# Altium PCB PCB.PcbDoc
Units mm, origin at the board's own origin, x right, y up, seen from the top; angles counter-clockwise.
Board outline 105.28 x 72.77 mm, 2 copper layers (Top Layer, Bottom Layer); 30 components, 24 nets, 119 pads, 15 vias.
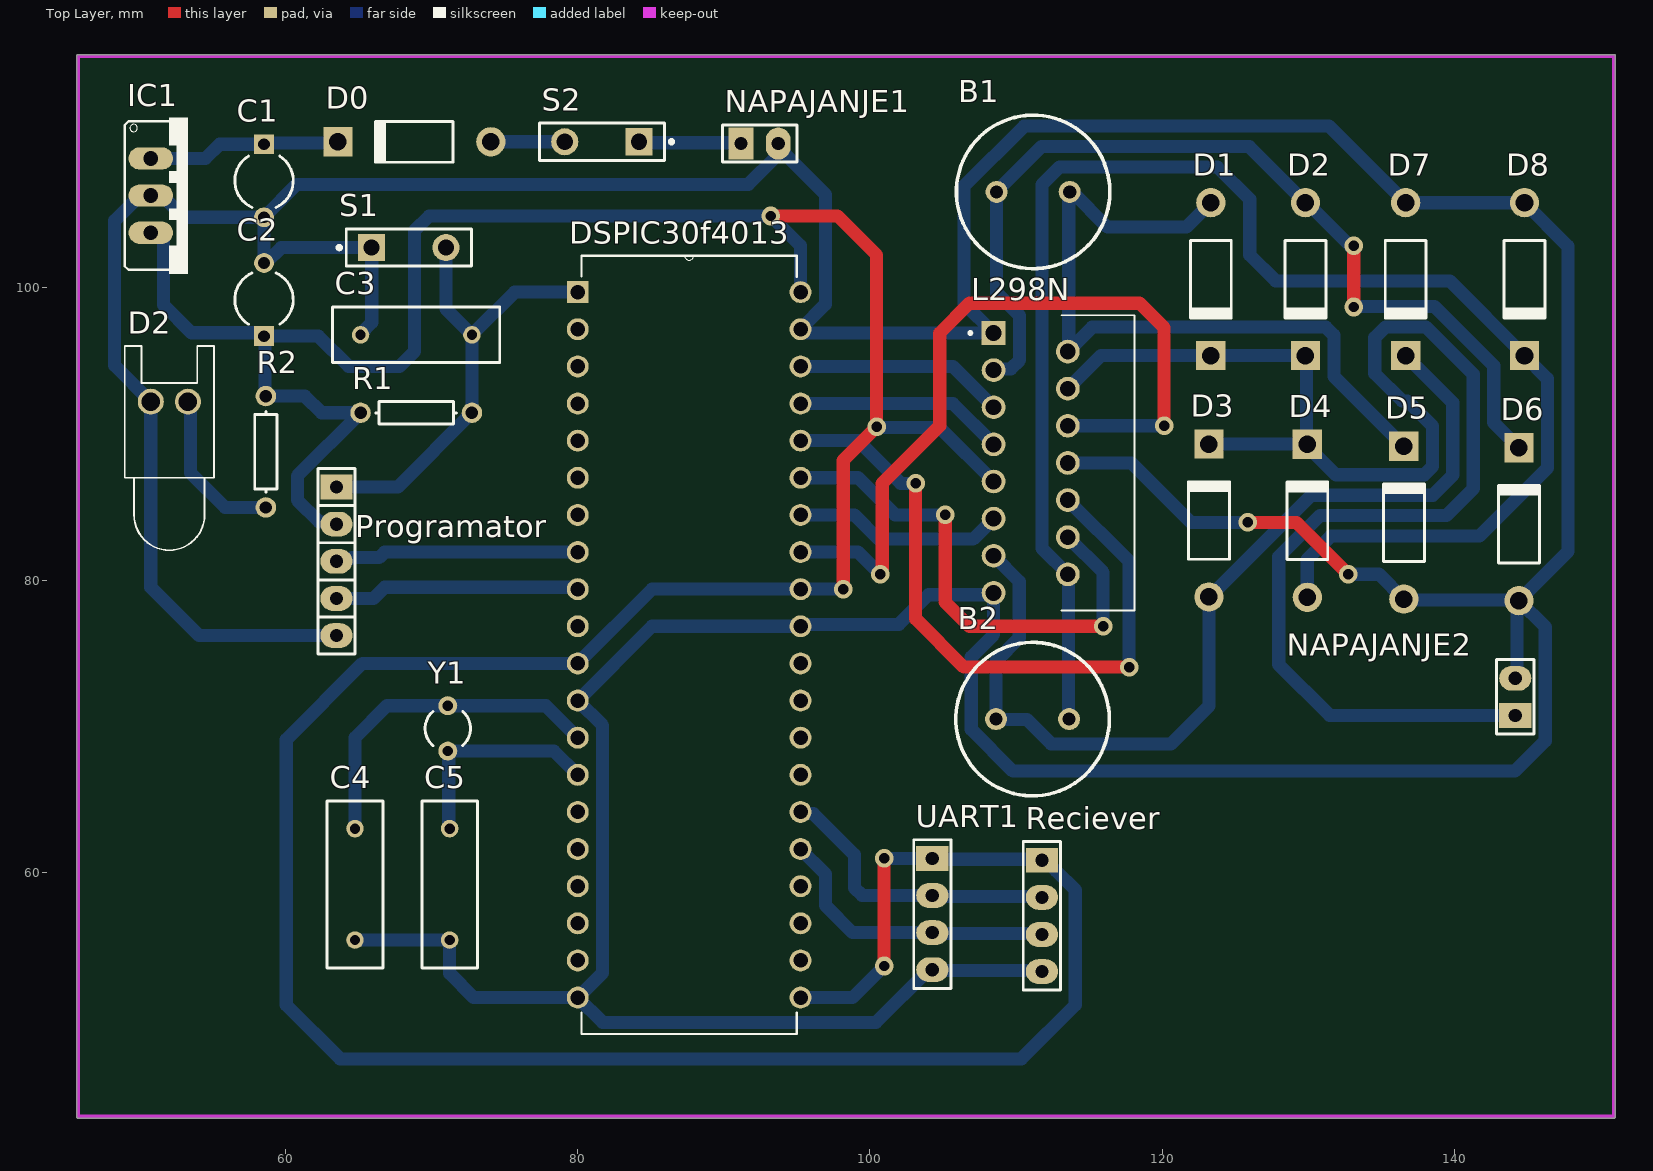
[diagram p0: Top Layer view]
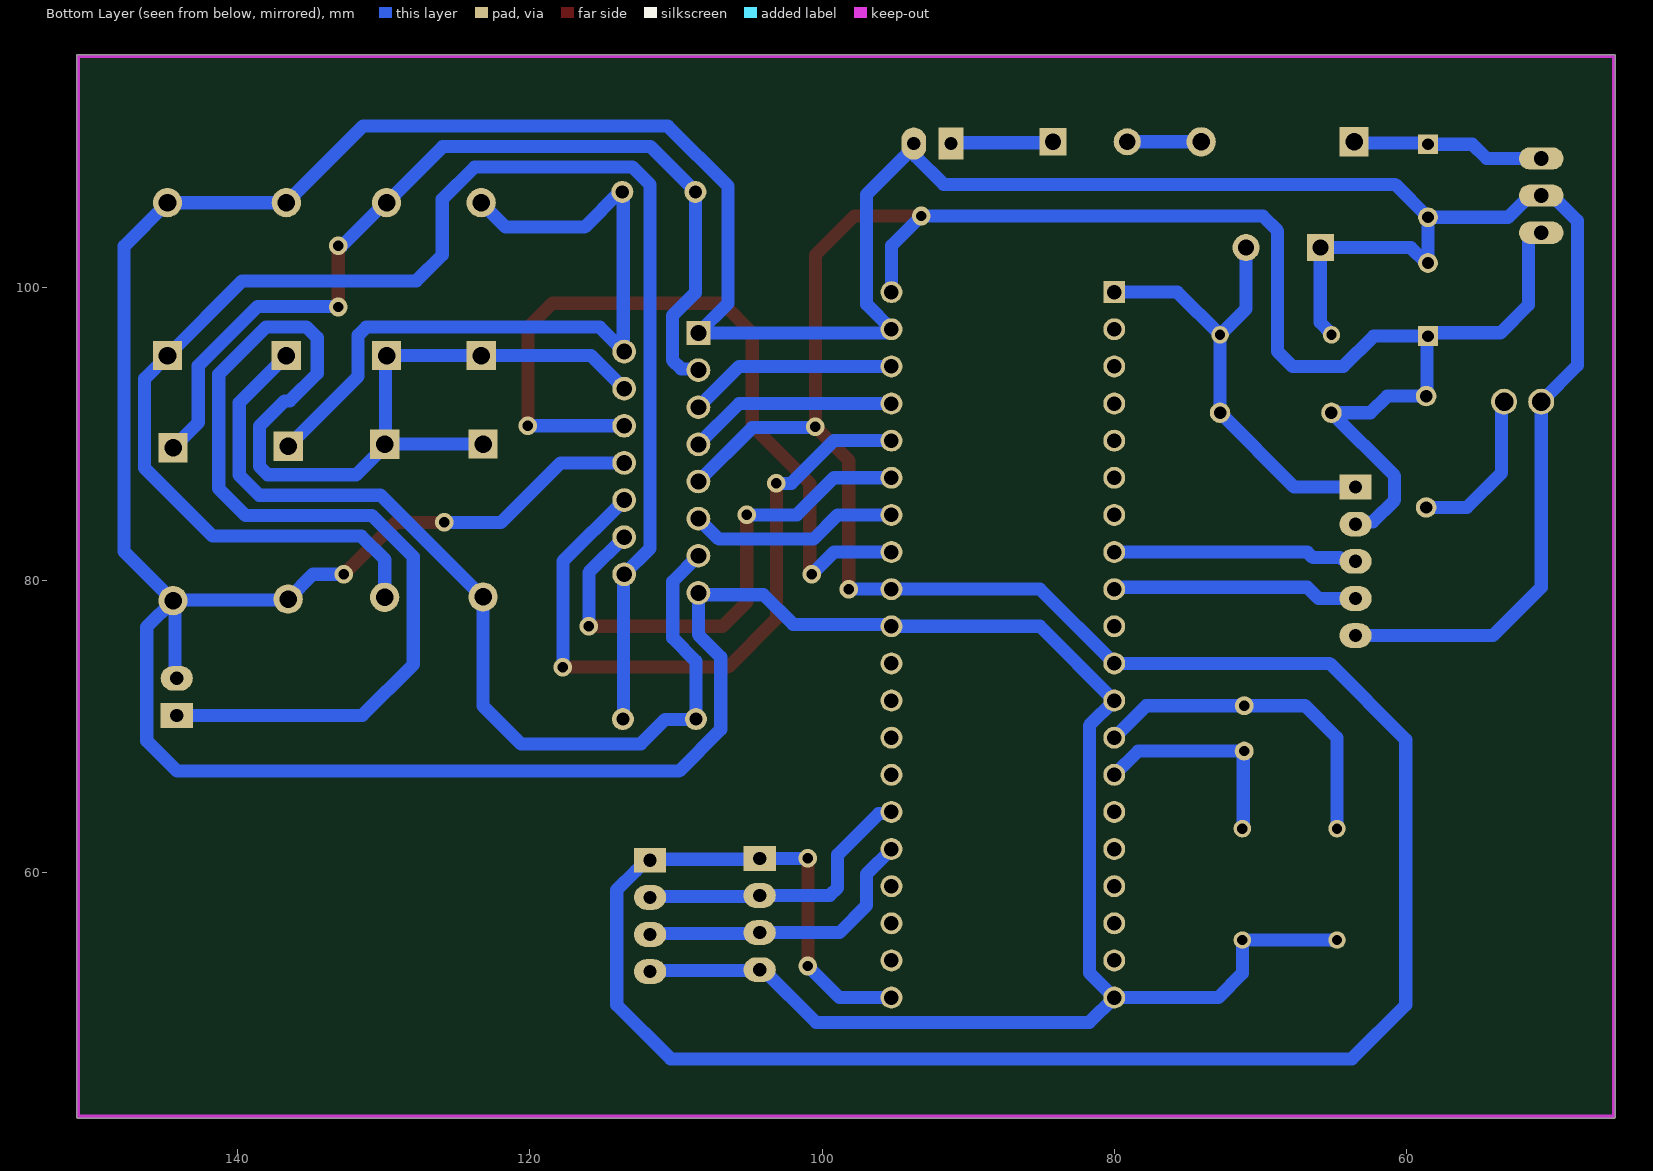
[diagram p1: Bottom Layer view, seen from below]

## Layer stack, top to bottom
Top Solder: solder mask 0.0102, Solder Resist, Dk 3.5
Top Layer: signal copper 0.0356
Dielectric 1: dielectric 0.32, FR-4, Dk 4.8
Bottom Layer: signal copper 0.0356
Bottom Solder: solder mask 0.0102, Solder Resist, Dk 3.5

## Board outline
45.72,43.307 45.72,115.824 cw(c45.847,115.824) 45.847,115.951 150.876,115.951 cw(c150.876,115.824) 151.003,115.824 151.003,43.307 cw(c150.876,43.307) 150.876,43.18 45.847,43.18 cw(c45.847,43.307)

## Design rules (kind name [scope] priority, off if disabled: settings)
Clearance [All] p1: gap=0.5 ignorepadtopadclearanceinfootprint=FALSE
PolygonConnect [All] p1: connectstyle=Relief reliefconductorwidth=0.254 reliefentries=4 polygonreliefangle="90 Angle" airgapwidth=0.254
RoutingVias [All] p1: holewidth=0.711 width=1.27 viastyle="Through Hole" minholewidth=0.711 minwidth=1.27 maxholewidth=0.711 maxwidth=1.27
SolderMaskExpansion [All] p1: expansion=0.102 istentingtop=FALSE
Width [All] p1: maxlimit=1 minlimit=0.8 preferedwidth=0.9 minimp=50.000000 maximp=50.000000 favimp=50.000000
30 further rules are at their usual default settings.

## Components (designator, comment, footprint, x,y, rotation, side; value= is the part's Value field where it differs from the comment)
B1 "Motor" RB5-10.5 111.165,106.553 r180 top
B2 "Motor" RB5-10.5 111.125,70.485 r0 top
C1 "Cap2" CAPR5-4X5 58.547,107.315 r270 top value=0.33uF
C2 "Cap2" CAPR5-4X5 58.547,99.187 r90 top value=0.1uF
C3 "Cap" RAD-0.3 68.961,96.774 r0 top value=100nF
C4 "Cap" RAD-0.3 64.77,59.182 r90 top value=22pF
C5 "Cap" RAD-0.3 71.247,59.182 r90 top value=22pF
D0 "Diode 1N4007" DO-41 68.834,109.982 r180 top
D1 "Diode 1N4001" DO-41 123.317,100.584 r270 top
D2 "Diode 1N4001" DO-41 129.794,100.584 r270 top
D2 "LED0" LED-0 52.07,92.202 r0 top
D3 "Diode 1N4001" DO-41 123.19,84.074 r90 top
D4 "Diode 1N4001" DO-41 129.921,84.051 r90 top
D5 "Diode 1N4001" DO-41 136.525,83.924 r90 top
D6 "Diode 1N4001" DO-41 144.399,83.82 r90 top
D7 "Diode 1N4001" DO-41 136.652,100.584 r270 top
D8 "Diode 1N4001" DO-41 144.78,100.584 r270 top
DSPIC30f4013 "DSPIC30f4013" DIP254P1524X635-40 95.25,51.435 r0 top
IC1 "L7805" 78XXS 53.34,106.299 r270 top
L298N "L298N" TO127P2020X500X2100-15 108.458,96.901 r0 top
NAPAJANJE1 "NAPAJANJE" HDR1X2 91.186,109.855 r0 top
NAPAJANJE2 "NAPAJANJE" HDR1X2 144.145,70.739 r90 top
Programator "Programator" HDR1X5 63.5,86.36 r270 top
R1 "Res1" AXIAL-0.3 68.961,91.44 r180 top value=10K
R2 "Res1" AXIAL-0.3 58.674,88.773 r90 top value=1K
Reciever "Reciever" HDR1X4 111.76,60.833 r270 top
S1 "SW-PB" SPST-2 68.453,102.743 r0 top
S2 "SW-SPST" SPST-2 81.661,109.982 r180 top
UART1 "UART1" HDR1X4 104.267,60.96 r270 top
Y1 "XTAL" R38 71.12,69.85 r0 top

## Footprints (in the part's own frame and the unit in brackets; to place one, negate y for a bottom-side part, rotate by r counter-clockwise, add the part's x,y. Pads: shape width x height; smd on the part's side, far side on the other; paste and mask are expansions set on the pad)
78XXS [mil]
  oval 60x120 hole 40: GND(0,-100) IN(-100,-100) OUT(100,-100)
  silkscreen extent -210,-170 210,0
AXIAL-0.3 [mm] "Axial Device, Thru-Hole; 2 Leads; 0.3 in Pin Spacing"
  round 1.4 hole 0.85: 1(-3.81,0) 2(3.81,0)
  silkscreen extent -2.77,-0.76 2.77,0.76
CAPR5-4X5 [mm] "Capacitor; 2 Leads"
  rect 1.35x1.35 hole 0.8: 1(-2.5,0)
  round 1.35 hole 0.8: 2(2.5,0)
  silkscreen extent -1.69,-2 1.82,2
DIP254P1524X635-40 [mil]
  rect 59x59 hole 39: 1(-600,1900)
  round 59 hole 39: 2(-600,1800) 3(-600,1700) 4(-600,1600) 5(-600,1500) 6(-600,1400) 7(-600,1300) 8(-600,1200) 9(-600,1100) 10(-600,1000) 11(-600,900) 12(-600,800) 13(-600,700) 14(-600,600) 15(-600,500) 16(-600,400) 17(-600,300) 18(-600,200) 19(-600,100) 20(-600,0) 21(0,0) 22(0,100) 23(0,200) 24(0,300) 25(0,400) 26(0,500) 27(0,600) 28(0,700) 29(0,800) 30(0,900) 31(0,1000) 32(0,1100) 33(0,1200) 34(0,1300) 35(0,1400) 36(0,1500) 37(0,1600) 38(0,1700) 39(0,1800) 40(0,1900)
  silkscreen extent -590,-98 -10,1998
DO-41 [mm] "Diode, Axial; Body 5.2 x 2.7 mm (LxDia. max), Lead Dia. 0.86 mm (max)"
  round 2 hole 1.2: 1(-5.23,0)
  rect 2x2 hole 1.2: 2(5.23,0)
  silkscreen extent -2.65,-1.4 2.75,1.4
HDR1X2 [mm]
  rect 1.7x2.2 hole 0.9: 1(0,0)
  oval 1.7x2.2 hole 0.9: 2(2.54,0)
  silkscreen extent -1.27,-1.27 3.81,1.27
HDR1X4 [mm]
  rect 1.7x2.2 hole 0.9: 1(0,0)
  oval 1.7x2.2 hole 0.9: 2(2.54,0) 3(5.08,0) 4(7.62,0)
  silkscreen extent -1.27,-1.27 8.89,1.27
HDR1X5 [mm]
  rect 1.7x2.2 hole 0.9: 1(0,0)
  oval 1.7x2.2 hole 0.9: 2(2.54,0) 3(5.08,0) 4(7.62,0) 5(10.16,0)
  silkscreen extent -1.27,-1.27 11.43,1.27
LED-0 [mil] "LED; 2 Leads"
  round 70 hole 50: 1(50,0) 2(-50,0)
  silkscreen extent -120,-400 120,150
R38 [mm] "Crystal, Thru-Hole; 2 Leads; Body 3.1 x 8.2 mm (Dia.xH)"
  round 1.3 hole 0.7: 1(0,1.55) 2(0,-1.55)
  silkscreen extent -1.55,-1.19 1.55,1.17
RAD-0.3 [mm] "Radial Cap, Thru-Hole; 2 Leads; 0.3 in Pin Spacing"
  round 1.2 hole 0.7: 1(-3.81,0) 2(3.81,0)
  silkscreen extent -5.71,-1.91 5.71,1.91
RB5-10.5 [mm] "Capacitor (Radial); 2 Leads"
  round 1.5 hole 0.9: 1(-2.5,0) 2(2.5,0)
  silkscreen extent -5.25,-5.25 5.25,5.25
SPST-2 [mm] "Switch; 2 Leads"
  rect 1.85x1.85 hole 1.1: 1(-2.54,0)
  round 1.85 hole 1.1: 2(2.54,0)
  silkscreen extent -4.89,-1.27 4.28,1.27
TO127P2020X500X2100-15 [mm]
  rect 1.62x1.62 hole 1.08: 1(0,0)
  round 1.62 hole 1.08: 2(5.08,-1.27) 3(0,-2.54) 4(5.08,-3.81) 5(0,-5.08) 6(5.08,-6.35) 7(0,-7.62) 8(5.08,-8.89) 9(0,-10.16) 10(5.08,-11.43) 11(0,-12.7) 12(5.08,-13.97) 13(0,-15.24) 14(5.08,-16.51) 15(0,-17.78)
  silkscreen extent -1.69,-18.99 9.63,1.21

## Part data
B1 B2: "Motor, General Kind", LatestRevisionDate=17-Jul-2002, LatestRevisionNote="Re-released for DXP Platform.", PackageDescription="Capacitor (Radial); 2 Leads", PackageReference=RB5-10.5, Published=24-Mar-1999, Publisher="Altium Limited"
C1 C2 C3 C4 C5: "Capacitor", Publisher="Altium Limited"
  C1 C2: PackageDescription="Capacitor; 2 Leads", PackageReference=CAPR5-4X5, Published=23-Sep-2002
  C3 C4 C5: LatestRevisionDate=17-Jul-2002, LatestRevisionNote="Re-released for DXP Platform.", PackageDescription="Radial Cap, Thru-Hole; 2 Leads; 0.3 in Pin Spacing", PackageReference=RAD-0.3, Published=8-Jun-2000
D0 D1 D2 D3 D4 D5 D6 D7 D8: "1 Amp General Purpose Rectifier", Code_JEDEC=DO-204-AL, ComponentLink1Description="Manufacturer Link", ComponentLink1URL=http://www.fairchildsemi.com/, ComponentLink2Description=Datasheet, ComponentLink2URL=http://www.fairchildsemi.com/ds/1N%2F1N4001.pdf, DatasheetVersion=1998, LatestRevisionDate=17-Jul-2002, LatestRevisionNote="Re-released for DXP Platform.", PackageDescription="Diode, Axial; Body 5.2 x 2.7 mm (LxDia. max), Lead Dia. 0.86 mm (max)", PackageReference=DO-41, PackageVersion=Aug-1999, Published=8-Jun-2000, Publisher="Altium Limited"
D2: "Typical INFRARED GaAs LED", LatestRevisionDate=08-Jul-2005, LatestRevisionNote="Mech Layer 1 removed.", PackageDescription="LED; 2 Leads", PackageReference=LED-0, Published=8-Jun-2000, Publisher="Altium Limited"
IC1: "Linear Voltage Regulator IC 1 Output 1.5A D2PAK", Package="TO-263-3 Inchange Semiconductor", Availability=Unavailable, MF=STMicroelectronics, MP=L7805, Price=None, SnapEDA_Link=https://www.snapeda.com/parts/L7805/STMicroelectronics/view-part/563125/?ref=snap
L298N: "Half Bridge _4_ Driver DC Motors, Relays, Solenoids, Stepper Motors Bipolar 15-Multiwatt", Package="Multiwatt-15 STMicroelectronics", Availability=Unavailable, MF=STMicroelectronics, MP=L298N, Price=None, SnapEDA_Link=https://www.snapeda.com/parts/L298N/STMicroelectronics/view-part/294022/?ref=snap
R1 R2: "Resistor", LatestRevisionDate=17-Jul-2002, LatestRevisionNote="Re-released for DXP Platform.", PackageDescription="Axial Device, Thru-Hole; 2 Leads; 0.3 in Pin Spacing", PackageReference=AXIAL-0.3, Published=8-Jun-2000, Publisher="Altium Limited"
S1: "Switch", LatestRevisionDate=17-Jul-2002, LatestRevisionNote="Re-released for DXP Platform.", PackageDescription="Switch; 2 Leads", PackageReference=SPST-2, Published=24-Mar-1999, Publisher="Altium Limited"
S2: "Single-Pole, Single-Throw Switch", LatestRevisionDate=17-Jul-2002, LatestRevisionNote="Re-released for DXP Platform.", PackageDescription="Switch; 2 Leads", PackageReference=SPST-2, Published=24-Mar-1999, Publisher="Altium Limited"
Y1: "Crystal Oscillator", LatestRevisionDate=17-Jul-2002, LatestRevisionNote="Re-released for DXP Platform.", PackageDescription="Crystal, Thru-Hole; 2 Leads; Body 3.1 x 8.2 mm (Dia.xH)", PackageReference=R38, Published=8-Jun-2000, Publisher="Altium Limited"

## Via types
v1: diameter 1.27, hole 0.711, Top Layer to Bottom Layer, 15 vias

## Nets (pads, with @x,y where several pads share a name; then routed paths per layer and width w, separated by ;. In a path a pad name is that pad's centre, name@x,y a point inside that pad or via, vN(x,y) a via of type N, cw(c..) or ccw(c..) an arc to the next point about the centre after c; other vN are vias at no path point)
5V: C2.1 DSPIC30f4013.11 DSPIC30f4013.21 DSPIC30f4013.32 DSPIC30f4013.40 IC1.OUT L298N.9 Programator.2 R1.2 R2.2 Reciever.1 UART1.1 | length 281.4
  Top Layer w0.9: v1(93.218,104.902) 97.79,104.902 100.457,102.235 100.457,90.507 v1(100.474,90.49) 98.171,88.187 v1(98.171,79.375) ; v1(100.965,53.594) v1(100.965,60.96)
  Bottom Layer w0.9: IC1.OUT 51.393,103.759 51.681,103.471 51.681,98.814 53.583,96.912 58.322,96.912 C2.1 ; Programator.2 63.347,83.973 62.331,83.973 60.833,85.471 60.833,87.122 R1.2 62.484,91.44 61.341,92.583 R2.2 58.61,92.647 58.61,96.623 C2.1 ; DSPIC30f4013.21 98.806,51.435 v1(100.965,53.594) ; DSPIC30f4013.40 95.25,102.87 v1(93.218,104.902) 69.85,104.902 68.834,103.886 68.834,95.631 67.818,94.615 64.331,94.615 62.259,96.687 C2.1 ; v1(98.171,79.375) DSPIC30f4013.32 85.09,79.375 DSPIC30f4013.11 65.278,74.295 60.071,69.088 60.071,50.927 63.754,47.244 110.363,47.244 114.046,50.927 114.046,58.803 112.756,60.093 112.75,60.093 112.01,60.833 Reciever.1 111.697,60.896 104.331,60.896 UART1.1 v1(100.965,60.96) ; v1(100.474,90.49) 100.54,90.424 104.775,90.424 L298N.9
9V: NAPAJANJE1.1 S2.1 | length 7
  Bottom Layer w0.9: S2.1 84.264,109.918 91.123,109.918 NAPAJANJE1.1
12V: D1.2 D2.2@129.794,95.354 D3.2 D4.2 L298N.4 NAPAJANJE2.1 | length 106.9
  Bottom Layer w0.9: L298N.4 115.801,95.354 D1.2 129.794,95.354 129.857,95.291 129.857,89.344 129.91,89.292 D4.2@129.791,89.292 ; D3.2 129.779,89.304 D4.2@129.791,89.292 ; NAPAJANJE2.1 131.445,70.739 127.971,74.213 127.971,81.593 130.782,84.404 139.427,84.404 141.275,86.252 141.275,90.194 141.275,94.075 138.046,97.304 135.258,97.304 134.535,96.58 134.535,94.128 136.408,92.254 136.769,92.254 138.475,90.548 138.475,87.76 137.919,87.204 131.879,87.204 D4.2@129.791,89.292
ENA: DSPIC30f4013.33 L298N.6 | length 54.5
  Top Layer w0.9: v1(100.711,80.391) 100.782,80.462 100.782,80.723 100.838,80.78 100.838,86.614 104.775,90.551 104.775,96.901 106.807,98.933 118.451,98.933 120.121,97.263 120.121,90.572 v1(120.142,90.551)
  Bottom Layer w0.9: DSPIC30f4013.33 99.187,81.915 v1(100.711,80.391) ; L298N.6 v1(120.142,90.551)
ENB: DSPIC30f4013.34 L298N.11 | length 14.5
  Bottom Layer w0.9: DSPIC30f4013.34 98.933,84.455 100.584,82.804 107.061,82.804 L298N.11
GND: C1.2 C2.2 C3.1 C4.1 C5.1 D2.2@50.8,92.202 D5.1 D6.1 D7.1 D8.1 DSPIC30f4013.12 DSPIC30f4013.20 DSPIC30f4013.31 DSPIC30f4013.39 IC1.GND L298N.1 L298N.8 L298N.15 NAPAJANJE1.2 NAPAJANJE2.2 Programator.5 Reciever.4 S1.1 UART1.4 | length 424.9
  Top Layer w0.9: v1(125.857,83.947) 129.159,83.947 v1(132.715,80.391)
  Bottom Layer w0.9: Programator.5 54.102,76.2 50.8,79.502 50.8,92.202 48.326,94.676 48.326,104.587 50.038,106.299 IC1.GND 51.581,106.299 53.065,104.815 C1.2 ; C4.1 C5.1 71.247,53.086 72.898,51.435 DSPIC30f4013.20 ; C3.1 65.151,96.855 65.913,97.617 S1.1 59.725,102.743 58.669,101.687 C2.2 C1.2 ; Reciever.4 111.697,53.276 104.331,53.276 UART1.4 104.017,53.34 100.413,49.736 81.709,49.736 DSPIC30f4013.20 ; L298N.8 117.89,88.011 121.954,83.947 v1(125.857,83.947) ; v1(132.715,80.391) 134.828,80.391 D5.1 136.577,78.642 144.347,78.642 D6.1 ; NAPAJANJE2.2 144.272,73.406 144.272,78.463 D6.1 ; C1.2 60.793,107.061 91.686,107.061 93.573,108.948 93.573,109.702 NAPAJANJE1.2 93.726,109.605 96.949,106.382 96.949,98.854 DSPIC30f4013.39 95.412,97.155 95.666,96.901 L298N.1 106.426,98.933 106.426,106.934 110.545,111.053 131.413,111.053 D7.1 D8.1 147.749,102.845 147.749,81.94 D6.1 ; DSPIC30f4013.20 81.709,53.134 81.709,70.056 DSPIC30f4013.12 85.09,76.835 DSPIC30f4013.31 95.365,76.95 95.788,76.95 95.8,76.962 101.981,76.962 104.007,78.988 108.325,78.988 L298N.15 108.458,76.265 106.925,74.732 106.925,69.781 109.777,66.929 144.126,66.929 146.195,68.998 146.195,76.794 D6.1
IN1: DSPIC30f4013.38 L298N.5 | length 14.4
  Bottom Layer w0.9: DSPIC30f4013.38 105.664,94.615 L298N.5
IN2: DSPIC30f4013.37 L298N.7 | length 14.4
  Bottom Layer w0.9: DSPIC30f4013.37 105.664,92.075 L298N.7
IN3: DSPIC30f4013.36 L298N.10 | length 47.5
  Top Layer w0.9: v1(103.124,86.614) 103.124,77.343 106.426,74.041 v1(117.729,74.041)
  Bottom Layer w0.9: DSPIC30f4013.36 99.187,89.535 102.108,86.614 v1(103.124,86.614) ; L298N.10 117.729,81.28 v1(117.729,74.041)
IN4: DSPIC30f4013.35 L298N.12 | length 35.5
  Top Layer w0.9: v1(105.156,84.455) 105.156,78.486 106.807,76.835 v1(115.951,76.835)
  Bottom Layer w0.9: DSPIC30f4013.35 99.187,86.995 101.727,84.455 v1(105.156,84.455) ; L298N.12 115.951,80.518 v1(115.951,76.835)
MCLR: C3.2 DSPIC30f4013.1 Programator.1 R1.1 S1.2 | length 31.9
  Bottom Layer w0.9: Programator.1 67.691,86.36 R1.1 C3.2 ; S1.2 70.993,98.552 C3.2 ; DSPIC30f4013.1 75.692,99.695 C3.2
NetC1_1: C1.1 D0.2 IC1.IN | length 13.3
  Bottom Layer w0.9: IC1.IN 54.538,108.839 55.514,109.815 C1.1 58.631,109.899 63.521,109.899 D0.2
NetD0_1: D0.1 S2.2 | length 5.1
  Bottom Layer w0.9: D0.1 S2.2
NetD2_1: D2.1@53.34,92.202 R2.1 | length 11.1
  Bottom Layer w0.9: D2.1@53.34,92.202 53.508,92.034 53.508,87.335 55.88,84.963 R2.1
OSC1: C4.2 DSPIC30f4013.13 Y1.1 | length 23.3
  Bottom Layer w0.9: C4.2 64.77,69.215 66.955,71.4 Y1.1 77.825,71.4 DSPIC30f4013.13
OSC2: C5.2 DSPIC30f4013.14 Y1.2 | length 14.9
  Bottom Layer w0.9: C5.2 71.19,63.049 71.19,68.23 Y1.2 78.385,68.3 DSPIC30f4013.14
OUT1: B1.1 D1.1 D5.2 L298N.2 | length 50.9
  Bottom Layer w0.9: L298N.2 L298N.2@113.602,95.694 ; D1.1 121.643,104.14 116.24,104.14 113.827,106.553 B1.1 113.602,106.489 L298N.2@113.602,95.694 ; D5.2 131.744,93.935 131.744,96.748 131.188,97.304 115.211,97.304 L298N.2@113.602,95.694
OUT2: B1.2 D2.1@129.794,105.814 D6.2 L298N.3 | length 64.5
  Top Layer w0.9: v1(133.096,98.679) v1(133.096,102.87)
  Bottom Layer w0.9: L298N.3 108.537,94.44 109.634,94.44 110.236,95.043 110.236,98.087 108.665,99.658 108.665,101.821 108.665,106.593 111.725,109.653 125.955,109.653 129.794,105.814 129.898,105.814 132.842,102.87 v1(133.096,102.87) ; v1(133.096,98.679) 133.121,98.704 138.625,98.704 142.675,94.654 142.675,90.774 D6.2
OUT3: B2.1 D3.1 D7.2 L298N.13 | length 66
  Bottom Layer w0.9: L298N.13 110.218,79.901 110.218,76.045 108.625,74.452 B2.1 108.642,70.468 110.725,70.468 112.408,68.785 120.601,68.785 123.19,71.374 D3.1 123.242,78.844 130.202,85.804 138.498,85.804 139.875,87.181 139.875,92.131 D7.2
OUT4: B2.2 D4.1 D8.2 L298N.14 | length 108.4
  Bottom Layer w0.9: B2.2 113.582,70.529 113.582,80.347 111.778,82.151 111.778,107.07 112.961,108.253 123.776,108.253 125.984,106.045 125.984,102.235 127.759,100.46 139.674,100.46 D8.2 146.349,93.785 146.349,87.656 141.697,83.004 131.518,83.004 129.921,81.407 D4.1
PGC: DSPIC30f4013.8 Programator.3 | length 16.8
  Bottom Layer w0.9: Programator.3 63.653,81.433 64.469,81.433 64.57,81.534 66.421,81.534 66.802,81.915 DSPIC30f4013.8
PGD: DSPIC30f4013.9 Programator.4 | length 16.9
  Bottom Layer w0.9: Programator.4 66.04,78.74 66.802,79.502 79.46,79.502 79.472,79.49 79.895,79.49 DSPIC30f4013.9
U1RX: DSPIC30f4013.26 Reciever.2 UART1.2 | length 20.3
  Bottom Layer w0.9: DSPIC30f4013.26 95.365,64.02 96.127,64.02 98.933,61.214 98.933,58.947 99.46,58.42 UART1.2 104.331,58.356 111.697,58.356 Reciever.2
U1TX: DSPIC30f4013.25 Reciever.3 UART1.3 | length 20.2
  Bottom Layer w0.9: DSPIC30f4013.25 96.949,59.896 96.949,57.737 98.806,55.88 UART1.3 104.331,55.816 111.697,55.816 Reciever.3
pads on no net: DSPIC30f4013.2 DSPIC30f4013.3 DSPIC30f4013.4 DSPIC30f4013.5 DSPIC30f4013.6 DSPIC30f4013.7 DSPIC30f4013.10 DSPIC30f4013.15 DSPIC30f4013.16 DSPIC30f4013.17 DSPIC30f4013.18 DSPIC30f4013.19 DSPIC30f4013.22 DSPIC30f4013.23 DSPIC30f4013.24 DSPIC30f4013.27 DSPIC30f4013.28 DSPIC30f4013.29 DSPIC30f4013.30

## Keep-outs
Keep-Out Layer:
  lines w0.254: 45.847,43.307 45.847,115.824 150.876,115.824 150.876,43.307 45.847,43.307

## Text inside footprints (layer, text, board x,y; h text height)
IC1: Mechanical 13 "O" at 49.527,104.393 h1.27 r270; Mechanical 13 "I" at 49.525,109.478 h1.27 r270; Mechanical 13 "-" at 49.528,106.934 h1.27 r270